# Altium PCB Filtro_PCB.PcbDoc
Units mm, origin at the board's own origin, x right, y up, seen from the top; angles counter-clockwise.
Board outline 57 x 50 mm, 2 copper layers (Top Layer, Bottom Layer); 15 components, 10 nets, 46 pads, 6 vias.
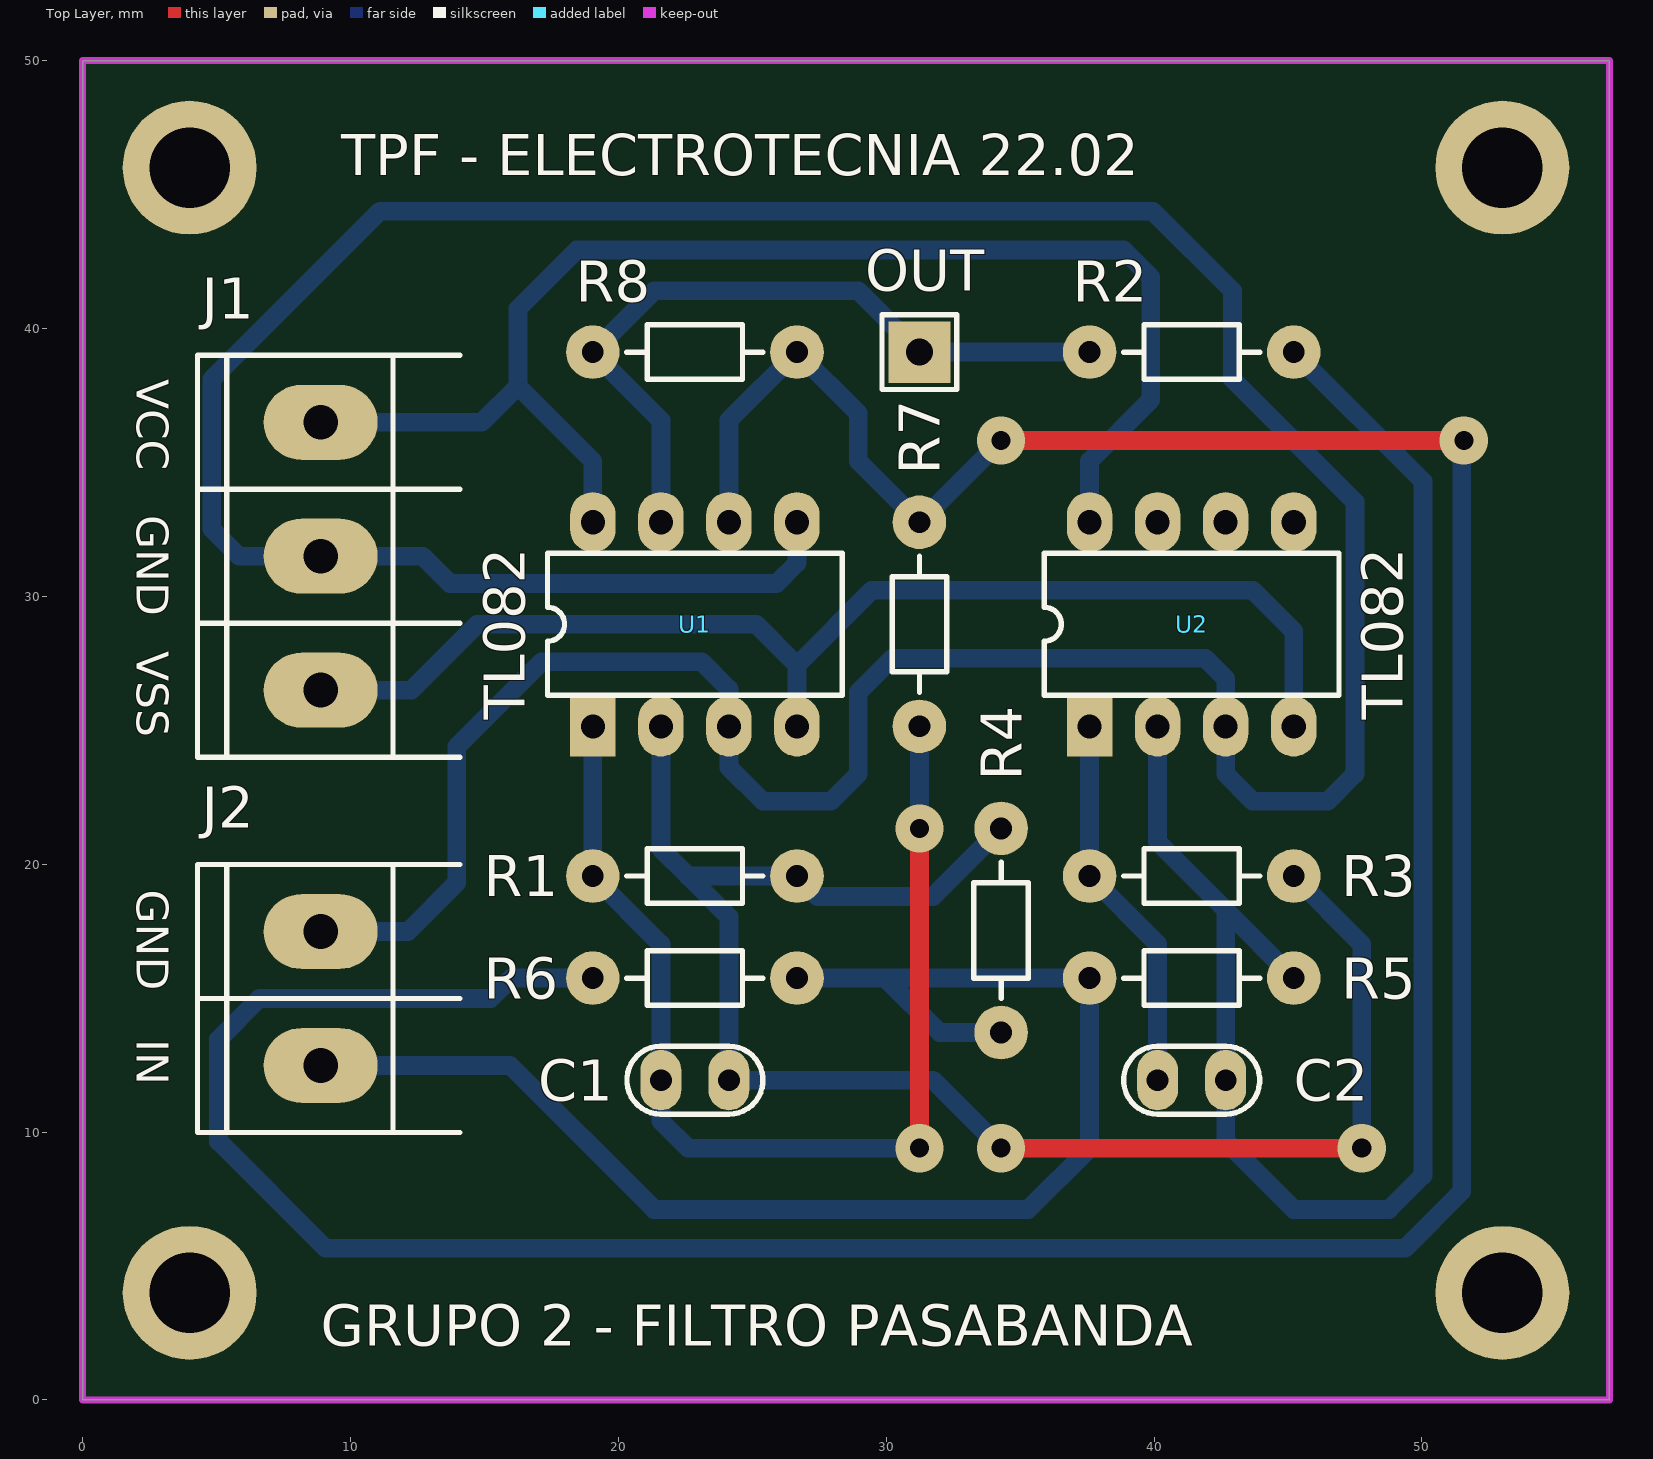
[diagram p0: Top Layer view]
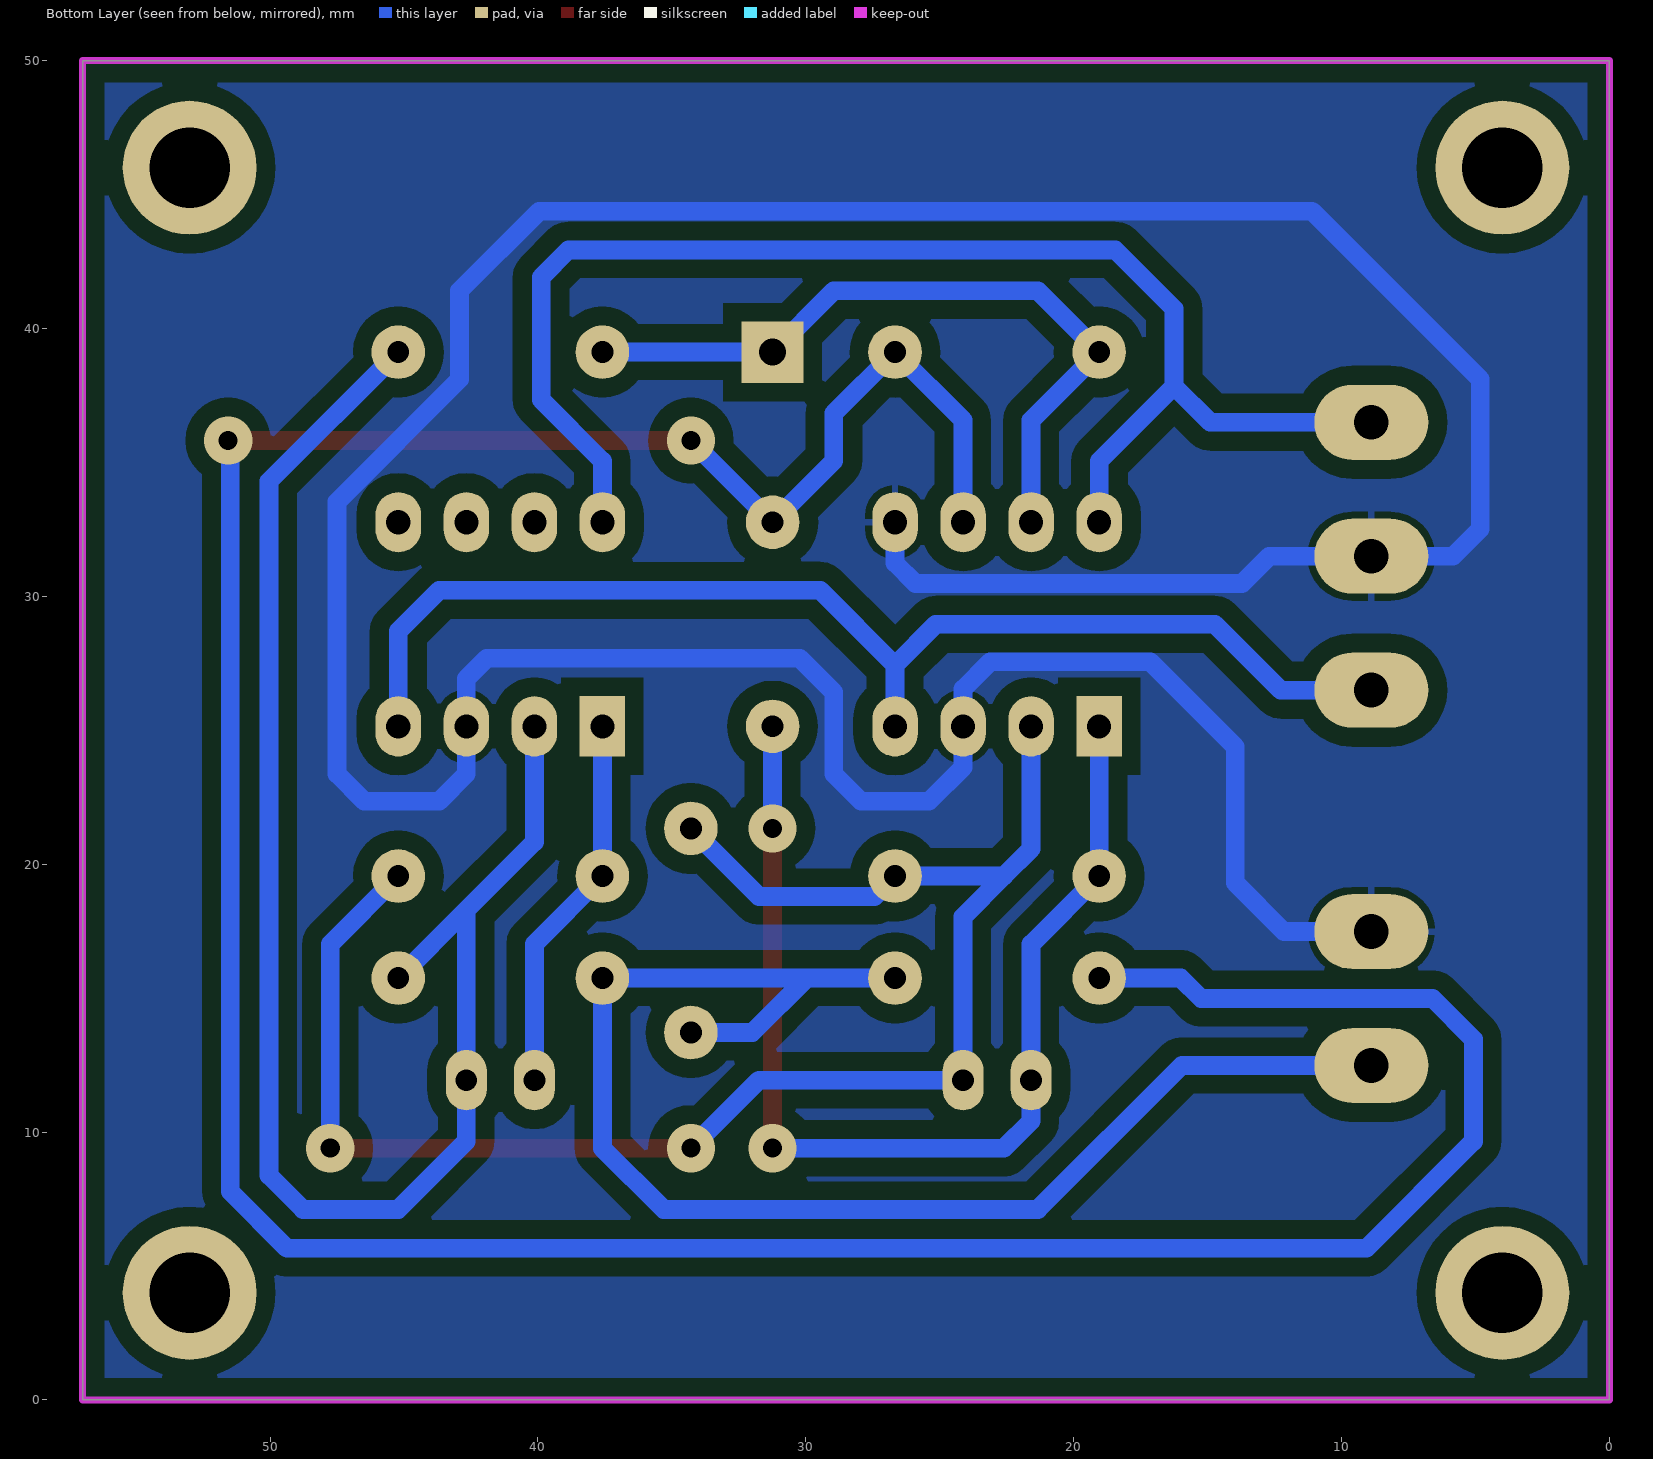
[diagram p1: Bottom Layer view, seen from below]
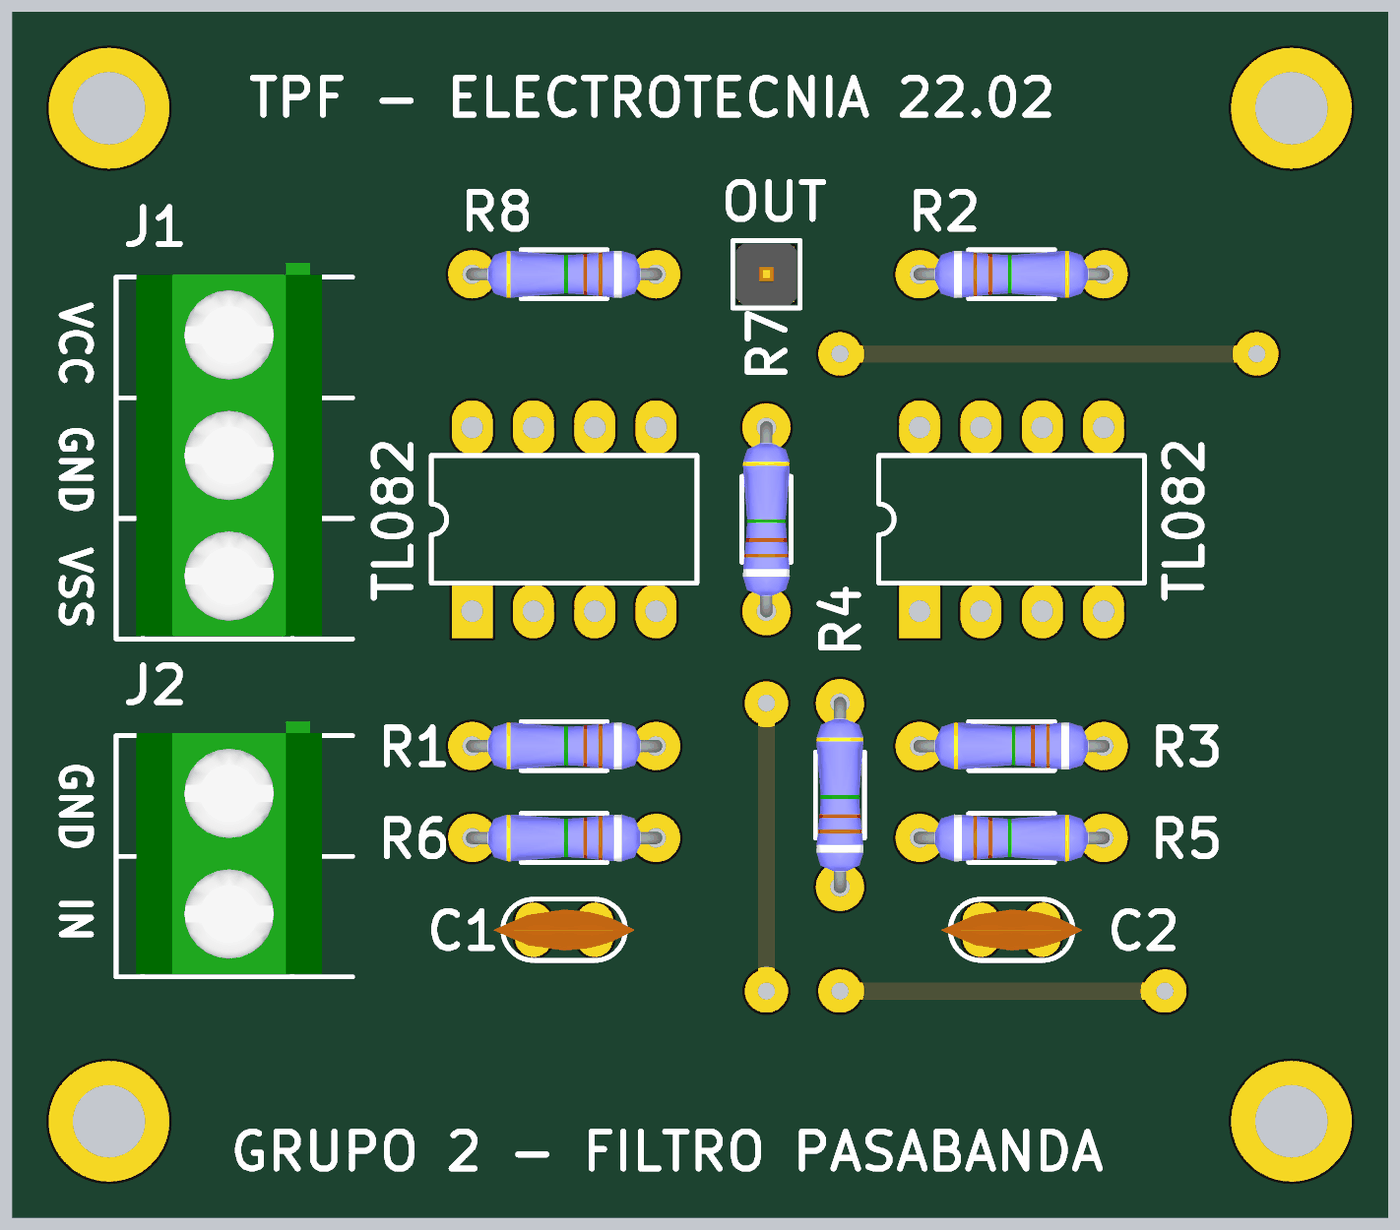
[diagram p2: 3D render of the assembled board from above, using the file's embedded part models]

## Layer stack, top to bottom
Top Solder: solder mask 0.0102, Solder Resist, Dk 3.5
Top Layer: signal copper 0.0356
Dielectric 1: dielectric 0.32, FR-4, Dk 4.8
Bottom Layer: signal copper 0.0356
Bottom Solder: solder mask 0.0102, Solder Resist, Dk 3.5

## Board outline
0,0 0,50 57,50 57,0

## Design rules (kind name [scope] priority, off if disabled: settings)
Clearance [All] p1: gap=0.7
Clearance Polygon [(OnLayer('Bottom Layer')) vs InPolygon] p2: gap=0.8
PolygonConnect [All] p1: connectstyle=Relief reliefconductorwidth=0.254 reliefentries=4 polygonreliefangle="90 Angle" airgapwidth=0.254
RoutingVias [All] p1: holewidth=0.711 width=1.27 viastyle="Through Hole" minholewidth=0.711 minwidth=1.27 maxholewidth=0.711 maxwidth=1.27
SolderMaskExpansion [All] p1: expansion=0.102
Width [All] p1: maxlimit=0.7 minlimit=0.7 preferedwidth=0.7
30 further rules are at their usual default settings.

## Components (designator, comment, footprint, x,y, rotation, side; value= is the part's Value field where it differs from the comment)
C1 "4nF" CAP100 22.86,11.938 r180 top
C2 "1nF" CAP100 41.402,11.938 r180 top
J1 "Fuente" BORNERA3 8.89,31.496 r0 top
J2 "V_IN" BORNERA2 8.89,14.986 r0 top
OUT "V_OUT" TPTH 31.242,39.116 r0 top (schematic designator TP1)
R1 "2K7" RES300 26.67,19.558 r180 top
R2 "2K7" RES300 37.592,39.116 r0 top
R3 "50K" RES300 45.212,19.558 r180 top
R4 "20K" RES300 34.29,13.716 r90 top
R5 "100K" RES300 37.592,15.748 r0 top
R6 "10K" RES300 26.67,15.748 r180 top
R7 "100K" RES300 31.242,25.146 r90 top
R8 "10K" RES300 26.67,39.116 r180 top
U1 "TL082BCN" DIP8 22.86,28.956 r0 top locked
U2 "TL082BCN" DIP8 41.402,28.956 r0 top locked

## Footprints (in the part's own frame and the unit in brackets; to place one, negate y for a bottom-side part, rotate by r counter-clockwise, add the part's x,y. Pads: shape width x height; smd on the part's side, far side on the other; paste and mask are expansions set on the pad)
BORNERA2 [mm] "Bornera con Tornillos 5mm separación"
  oval 4.25x2.8 hole 1.3: 1(0,2.5) 2(0,-2.5)
  silkscreen extent -4.6,-5 5.2,5, body extent -3.76,-4.89 3.94,5.61, height 10
BORNERA3 [mm] "Bornera con Tornillos 5mm separación"
  oval 4.25x2.8 hole 1.3: 1(0,5) 2(0,0) 3(0,-5)
  silkscreen extent -4.6,-7.5 5.2,7.5, body extent -3.76,-7.39 3.94,8.11, height 10.05
CAP100 [mm]
  oval 1.525x2.25 hole 0.813: 1(-1.27,0) 2(1.27,0)
  silkscreen extent -2.54,-1.27 2.54,1.27, body extent -2.92,-0.84 2.92,0.86, height 6.12
DIP8 [mm] "DIP; 8 Leads; Row Spacing 7.62 mm; Pitch 2.54 mm"
  rect 1.7x2.25 hole 0.9: 1(-3.81,-3.81)
  oval 1.7x2.25 hole 0.9: 2(-1.27,-3.81) 3(1.27,-3.81) 4(3.81,-3.81) 5(3.81,3.81) 6(1.27,3.81) 7(-1.27,3.81) 8(-3.81,3.81)
  silkscreen extent -5.5,-2.65 5.5,2.65
RES300 [mm]
  round 2 hole 0.813: 1(0,0) 2(7.62,0)
  silkscreen extent 1.27,-1.02 6.35,1.02, body extent -0.25,-0.97 7.87,0.97, height 2.01
TPTH [mm]
  rect 2.3x2.3 hole 1.016: 1(0,0)
  silkscreen extent -1.4,-1.4 1.4,1.4, body extent -1.27,-1.27 1.27,1.27, height 6.04

## Part data
C1 C2: library part CAP
J1: library part "BORNERA 3"
J2: library part "BORNERA 2"
OUT: library part TP
R1 R2 R3 R4 R5 R6 R7 R8: library part RES
U1 U2: "General-Purpose J-FET Dual Operational Amplifier"

## Free pads (board coordinates)
  round 5 hole 3: 0(4,4) 1(53,4) 2(53,46) 3(4,46)

## Via types
v1: diameter 1.8, hole 0.711, Top Layer to Bottom Layer, 6 vias

## Nets (pads, with @x,y where several pads share a name; then routed paths per layer and width w, separated by ;. In a path a pad name is that pad's centre, name@x,y a point inside that pad or via, vN(x,y) a via of type N, cw(c..) or ccw(c..) an arc to the next point about the centre after c; other vN are vias at no path point)
GND: J1.2 J2.1 U1.3 U1.5 U2.3 | length 150.3
  Bottom Layer w0.7: J2.1 12.152,17.486 13.97,19.304 13.97,24.384 17.142,27.556 23.114,27.556 24.13,26.54 U1.3 24.13,23.622 25.4,22.352 27.94,22.352 28.956,23.368 28.956,26.416 30.226,27.686 41.91,27.686 42.672,26.924 U2.3 42.672,23.368 43.688,22.352 46.482,22.352 47.498,23.368 47.498,33.528 42.926,38.1 42.926,41.402 39.952,44.376 11.102,44.376 4.826,38.1 4.826,32.512 5.842,31.496 12.7,31.496 13.716,30.48 25.908,30.48 26.67,31.242 U1.5
NetC1_1: C1.1 R1.1 R3.1 R4.2 U1.2 | length 63.2
  Top Layer w0.7: v1(34.29,9.398) v1(47.752,9.398)
  Bottom Layer w0.7: U1.2 21.59,20.574 22.606,19.558 ; v1(34.29,9.398) 31.75,11.938 C1.1 24.13,18.034 22.606,19.558 ; R4.2 31.75,18.796 27.432,18.796 R1.1 22.606,19.558 ; R3.1 47.752,17.018 v1(47.752,9.398)
NetC1_2: C1.2 R1.2 R7.1 U1.1 | length 41.6
  Top Layer w0.7: v1(31.242,9.398) v1(31.242,21.336)
  Bottom Layer w0.7: U1.1 R1.2 21.59,17.018 C1.2 21.59,10.414 22.606,9.398 v1(31.242,9.398) ; v1(31.242,21.336) R7.1
NetC2_1: C2.1 R2.2 R5.2 U2.2 | length 61.8
  Bottom Layer w0.7: U2.2 40.132,20.828 42.672,18.288 ; R5.2 42.672,18.288 ; R2.2 50.038,34.29 50.038,8.382 48.768,7.112 45.212,7.112 42.672,9.652 C2.1 42.672,18.288
NetC2_2: C2.2 R3.2 U2.1 | length 14.3
  Bottom Layer w0.7: U2.1 R3.2 40.132,17.018 C2.2
NetR2_1: OUT.1 R2.1 R8.2 U1.7 | length 26.8
  Bottom Layer w0.7: U1.7 21.59,36.576 R8.2 21.336,41.402 28.956,41.402 OUT.1 36.576,39.116
NetR6_2: R6.2 R7.2 R8.1 U1.6 | length 133
  Top Layer w0.7: v1(34.29,35.814) v1(51.562,35.814)
  Bottom Layer w0.7: R6.2 16.002,15.748 15.24,14.986 6.604,14.986 5.08,13.462 5.08,9.652 9.07,5.662 49.369,5.662 51.488,7.781 51.488,35.74 v1(51.562,35.814) ; U1.6 24.13,36.576 R8.1 28.956,36.83 28.956,35.052 R7.2 v1(34.29,35.814)
V_IN: J2.2 R4.1 R5.1 R6.1 | length 54.3
  Bottom Layer w0.7: J2.2 15.962,12.486 21.336,7.112 35.306,7.112 37.592,9.398 R5.1 29.972,15.748 ; R6.1 29.972,15.748 ; R4.1 32.004,13.716 29.972,15.748
VCC: J1.1 U1.8 U2.8 | length 52.1
  Bottom Layer w0.7: J1.1 14.906,36.496 16.256,37.846 ; U1.8 19.05,35.052 16.256,37.846 ; U2.8 37.592,35.052 39.878,37.338 39.878,41.91 38.862,42.926 18.448,42.926 16.256,40.734 16.256,37.846
VSS: J1.3 U1.4 U2.4 | length 45.6
  Bottom Layer w0.7: J1.3 12.272,26.496 14.732,28.956 25.146,28.956 26.67,27.432 ; U1.4 26.67,27.432 ; U2.4 45.212,28.702 43.688,30.226 29.464,30.226 26.67,27.432
pads on no net: U2.5 U2.6 U2.7

## Polygon pours and split planes (outlines as drawn)
GND on Bottom Layer "Top Overlay-No Net" (solid, pour order 3): 0,50 57,50 57,0 0,0

## Keep-outs
Keep-Out Layer:
  the board outline again, w0.254

## Silkscreen, mask and mechanical layers (free items; w line width, h text height)
Top Overlay:
  text "TPF - ELECTROTECNIA 22.02" at 9.652,45.72 h1.52
  text "VCC" at 2.032,38.1 h1.2 r270
  text "GND" at 2.032,33.02 h1.2 r270
  text "VSS" at 2.032,27.94 h1.2 r270
  text "TL082" at 16.51,25.4 h1.52 r90
  text "TL082" at 49.276,25.4 h1.52 r90
  text "GND" at 2.032,19.05 h1.2 r270
  text "IN" at 2.032,13.462 h1.2 r270
  text "GRUPO 2 - FILTRO PASABANDA" at 8.89,2.032 h1.52